# EAGLE board Control Acceso Doble Faz (EAGLE 9.6.2)
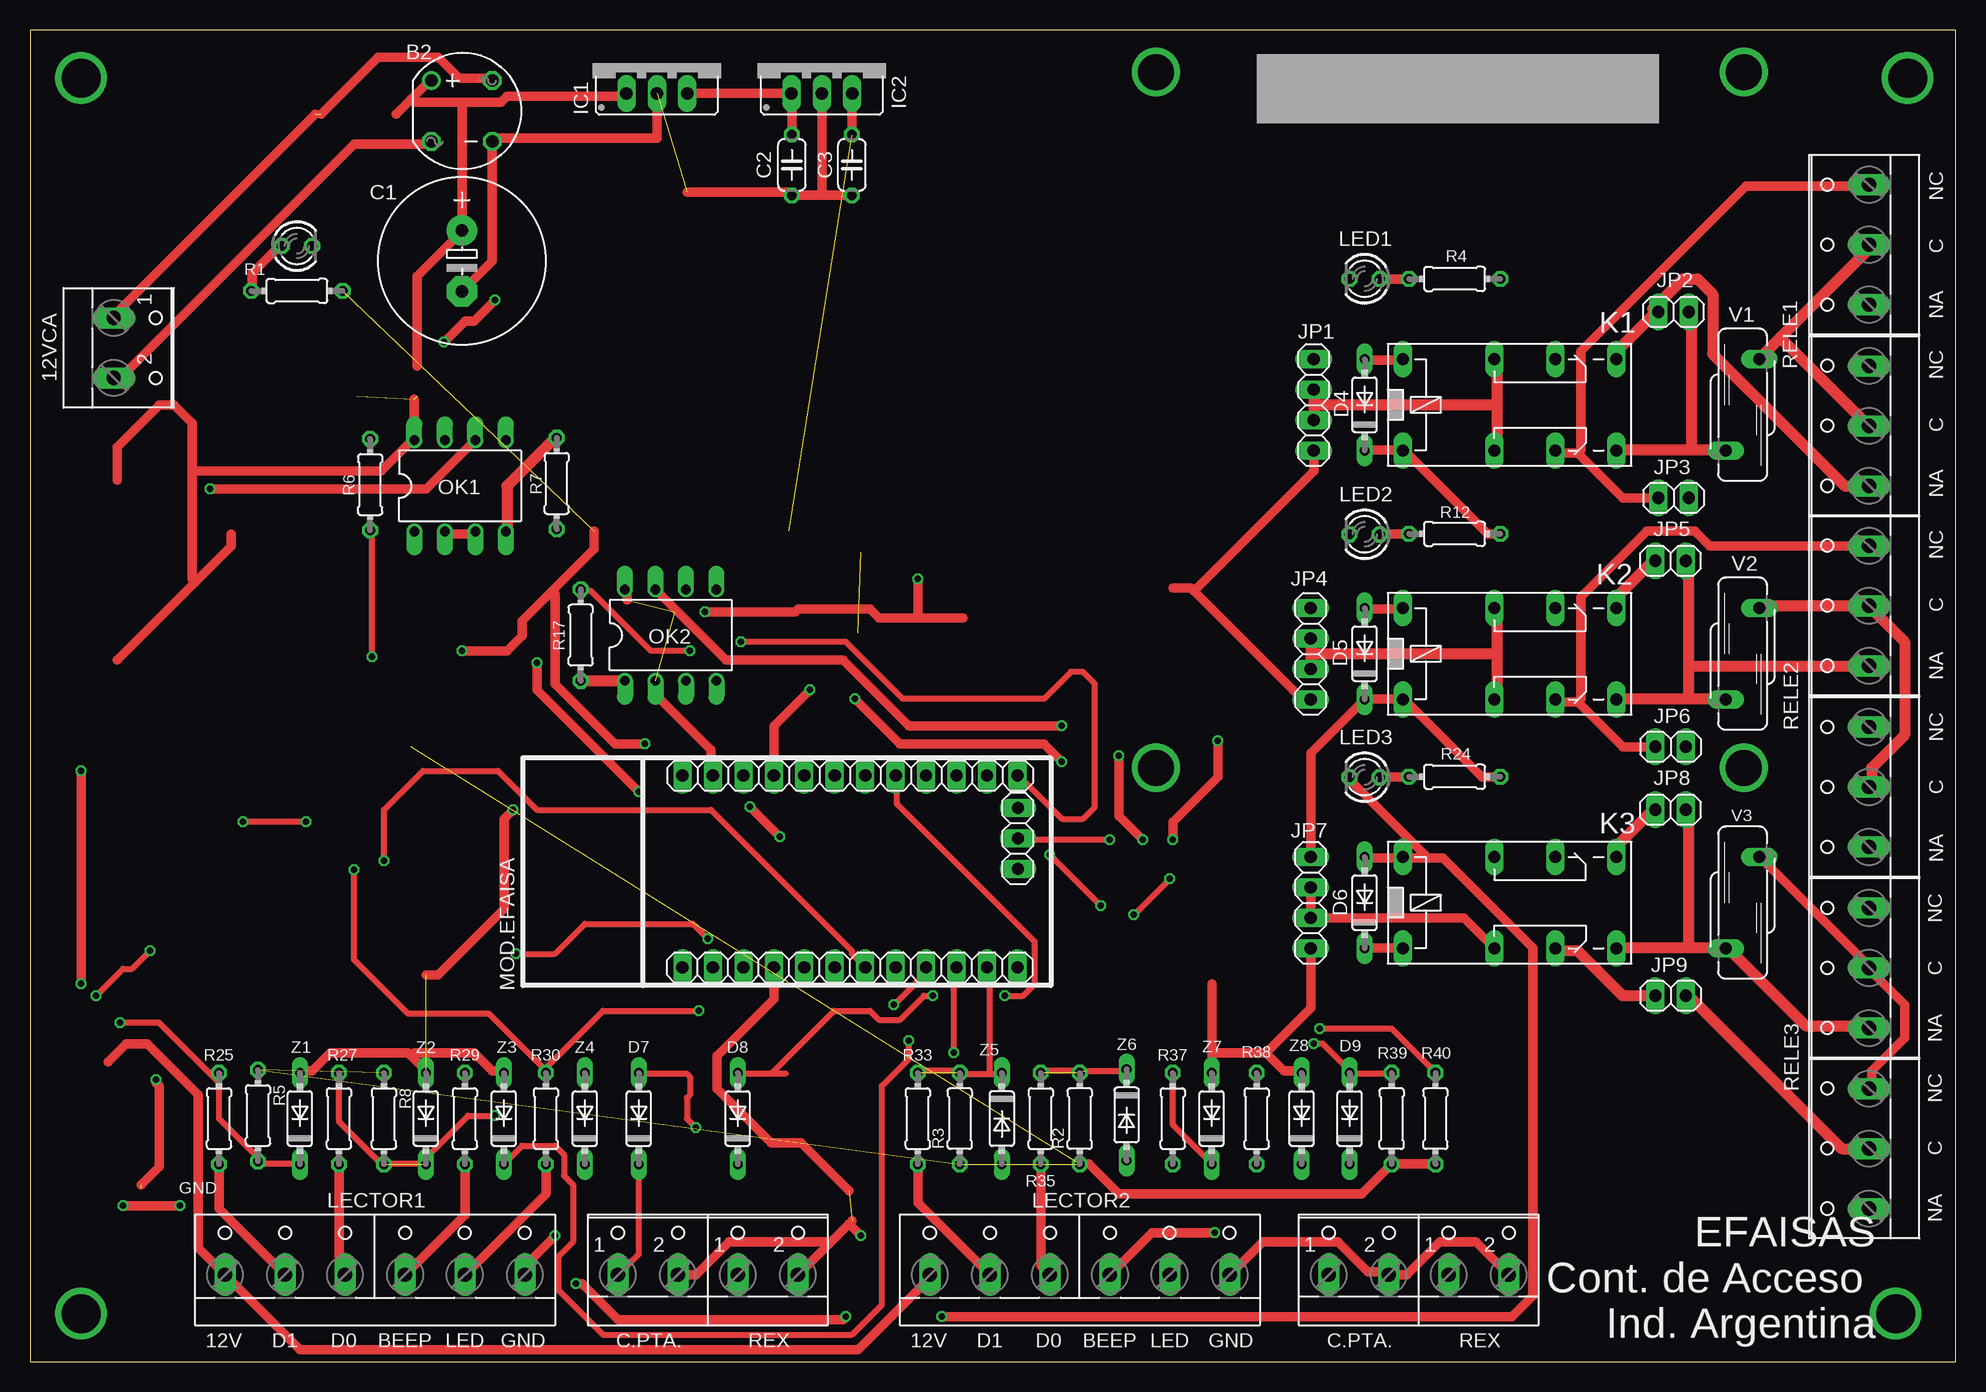
[diagram p0: board, top side]
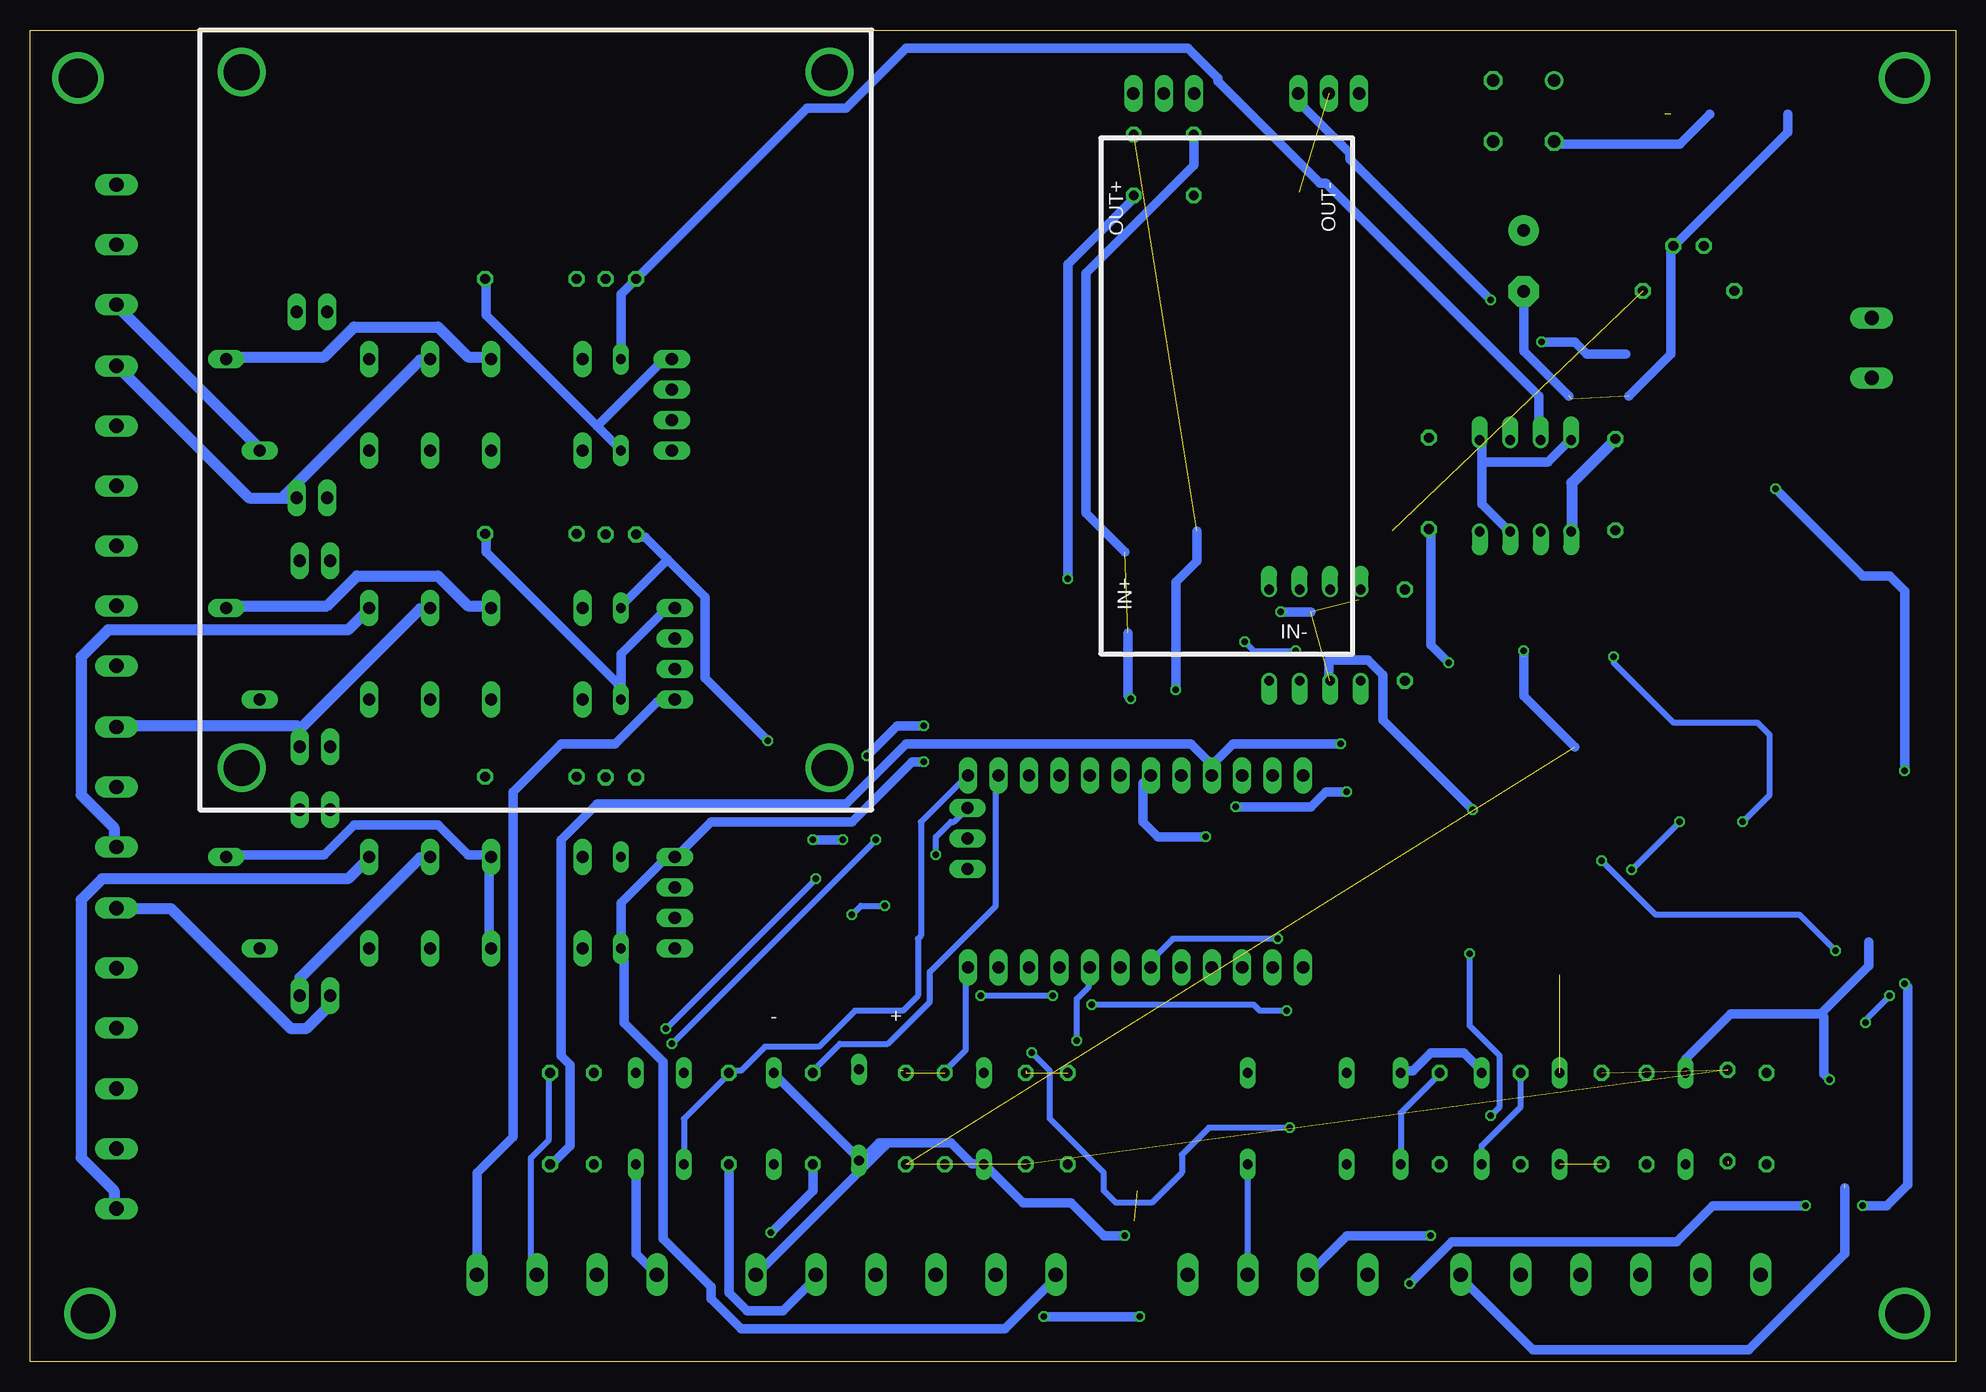
[diagram p1: board, bottom side, seen from below]

Size 160.5 x 111 mm. Coordinates in mm from the lower left corner, seen from the top.
Outline: 0,0 160.5,0 160.5,111 0,111 0,0
Copper layers (1*16): Top 0.035mm / dielectric 1.5mm / Bottom 0.035mm
Design rules "default *": minimum track width 0.3mm, minimum drill 20mil, track to track 0.4mm, track to pad 0.25mm, pad to pad 0.25mm, via to via 0.25mm, smd to smd 8mil, copper to edge 0.4mm, drill to drill 8mil, minimum pad ring 10mil, minimum via ring 8mil, stop-mask expansion 4mil, vias tented up to drill 0mil, thermal gap 10mil
Net classes: 0 gruesa: width 0.9 mm, drill 0.508 mm, clearance 0.559 mm; 1 normal: width 0.8 mm, drill 0.508 mm, clearance 0.559 mm; 2 fina: width 0.5 mm, drill 0.508 mm, clearance 0.381 mm; 3 Ultra Fina: width 0.4 mm, drill 0.508 mm, clearance 0.254 mm

## Footprints (pad centres in the part's own frame; a part is rotated, then mirrored left to right if it is on the bottom)
W237-102 = drill 1.194 long: 1 -2.5,-1.27; 2 2.5,-1.27
RB1A = drill 1.016: + -2.54,2.54 | drill 1.016 octagon: - 2.54,-2.54; AC1 2.54,2.54; AC2 -2.54,-2.54
E5-13 = drill 1.016 pad 2.54: + -2.54,0 | drill 1.016 pad 2.54 octagon: - 2.54,0
C050-024X044 = drill 0.813 octagon: 1 -2.54,0; 2 2.54,0
DO35-7 = drill 0.813 long: A 3.81,0; C -3.81,0
78XXS = drill 1.016 long: GND 0,-2.54; IN -2.54,-2.54; OUT 2.54,-2.54
1X12 = drill 1.016 long: 1 -13.97,0; 2 -11.43,0; 3 -8.89,0; 4 -6.35,0; 5 -3.81,0; 6 -1.27,0; 7 1.27,0; 8 3.81,0; 9 6.35,0; 10 8.89,0; 11 11.43,0; 12 13.97,0
1X03 = drill 1.016 long: 1 -2.54,0; 2 0,0; 3 2.54,0
1X04 = drill 1.016 long: 1 -3.81,0; 2 -1.27,0; 3 1.27,0; 4 3.81,0
1X02 = drill 1.016 long: 1 -1.27,0; 2 1.27,0
351 = drill 1.016 long: 1 -3.81,-3.81; 16 -3.81,3.81; O1 8.89,-3.81; O2 8.89,3.81; P1 3.81,-3.81; P2 3.81,3.81; S1 13.97,-3.81; S2 13.97,3.81
W237-6 = drill 1.194 long: 1 -12.5,-1.27; 2 -7.5,-1.27; 3 -2.5,-1.27; 4 2.5,-1.27; 5 7.5,-1.27; 6 12.5,-1.27
LED3MM = drill 0.813 octagon: A -1.27,0; K 1.27,0
DIL08 = drill 0.813 offset: 1 -3.81,-3.81; 2 -1.27,-3.81; 3 1.27,-3.81; 4 3.81,-3.81; 5 3.81,3.81; 6 1.27,3.81; 7 -1.27,3.81; 8 -3.81,3.81
0204/7 = drill 0.813 octagon: 1 -3.81,0; 2 3.81,0
W237-103 = drill 1.194 long: 1 -5,-1.29; 2 0,-1.29; 3 5,-1.29
S10K230 = drill 1.016 long: 1 -1.397,-3.81; 2 1.397,3.81

## Placement (x,y rotation side)
12VCA  [W237-102]  8.25,84.5 270 top
B2  [RB1A]  36,104.25 0 top
C1  [E5-13]  36,91.75 270 top
C2  [C050-024X044]  63.5,99.75 270 top
C3  [C050-024X044]  68.5,99.75 270 top
D4  1N4148DO35-7  [DO35-7]  111.25,79.75 90 top
D5  1N4148DO35-7  [DO35-7]  111.25,59 90 top
D6  1N4148DO35-7  [DO35-7]  111.25,38.25 90 top
D7  1N4148DO35-7  [DO35-7]  50.75,20.25 90 top
D8  1N4148DO35-7  [DO35-7]  59,20.25 90 top
D9  1N4148DO35-7  [DO35-7]  110,20.25 90 top
IC1  LM7812  [78XXS]  52.25,108.25 0 top
IC2  LM7807  [78XXS]  66,108.25 0 top
J1  [1X12]  68.35,48.85 0 top
J4  [1X03]  82.35,43.6 270 top
JP1  [1X04]  107,79.75 90 top
JP2  [1X02]  137,87.5 180 top
JP3  [1X02]  137,72 0 top
JP4  [1X04]  106.75,59 90 top
JP5  [1X02]  136.75,66.75 180 top
JP6  [1X02]  136.75,51.25 0 top
JP7  [1X04]  106.75,38.25 90 top
JP8  [1X02]  136.75,46 180 top
JP9  [1X02]  136.75,30.5 0 top
K1  351  [351]  118.25,79.75 0 top
K2  351  [351]  118.25,59 0 top
K3  351  [351]  118.25,38.25 0 top
LECTOR1  [W237-6]  28.75,8.5 0 top
LECTOR2  [W237-6]  87.5,8.5 0 top
LED1  ON  [LED3MM]  111.25,90.25 180 top
LED2  ON  [LED3MM]  111.25,68.95 180 top
LED3  ON  [LED3MM]  111.25,48.7 180 top
LED4  ON  [LED3MM]  22.25,93 0 top
MOD.EFAISA  [1X12]  68.35,32.85 180 top
OK1  ILD30  [DIL08]  35.85,73 0 top
OK2  ILD30  [DIL08]  53.4,60.55 0 top
R1  390Ω  [0204/7]  22.25,89.25 0 top
R2  3K3  [0204/7]  87.5,20.25 90 top
R3  3K3  [0204/7]  77.5,20.25 90 top
R4  1k  [0204/7]  118.75,90.25 0 top
R5  3K3  [0204/7]  19,20.5 270 top
R6  120Ω  [0204/7]  28.35,73.1 270 top
R7  120Ω  [0204/7]  43.9,73.2 270 top
R8  3K3  [0204/7]  29.5,20.25 270 top
R12  1k  [0204/7]  118.75,69 0 top
R17  120Ω  [0204/7]  45.9,60.55 90 top
R24  1k  [0204/7]  118.75,48.75 0 top
R25  100Ω  [0204/7]  15.75,20.25 270 top
R27  100Ω  [0204/7]  25.75,20.25 270 top
R29  100Ω  [0204/7]  36.25,20.25 270 top
R30  100Ω  [0204/7]  43,20.25 270 top
R33  100Ω  [0204/7]  74,20.25 270 top
R35  100Ω  [0204/7]  84.25,20.25 270 top
R37  100Ω  [0204/7]  95.25,20.25 270 top
R38  100Ω  [0204/7]  102.25,20.25 270 top
R39  4K7  [0204/7]  113.5,20.25 90 top
R40  4K7  [0204/7]  117.15,20.25 90 top
RELE1  [W237-103]  152,93.1 90 top
RELE2  [W237-103]  152,63 90 top
RELE3  [W237-103]  152,32.8 90 top
RELE4  [W237-103]  152,78 90 top
RELE5  [W237-103]  152,47.9 90 top
RELE6  [W237-103]  152,17.75 90 top
V1  S10K230  [S10K230]  142.75,79.75 180 top
V2  S10K230  [S10K230]  142.75,59 180 top
V3  S10K230  [S10K230]  142.75,38.25 180 top
X1  [W237-102]  51.5,8.5 0 top
X2  [W237-102]  110.75,8.5 0 top
X3  [W237-102]  120.75,8.5 0 top
X4  [W237-102]  61.5,8.5 0 top
Z1  ZENNER 4V7  [DO35-7]  22.5,20.25 90 top
Z2  ZENNER 4V7  [DO35-7]  33,20.25 90 top
Z3  ZENNER 4V7  [DO35-7]  39.5,20.25 90 top
Z4  ZENNER 4V7  [DO35-7]  46.25,20.25 90 top
Z5  ZENNER 4V7  [DO35-7]  81,20.25 270 top
Z6  ZENNER 4V7  [DO35-7]  91.4,20.55 270 top
Z7  ZENNER 4V7  [DO35-7]  98.5,20.25 90 top
Z8  ZENNER 4V7  [DO35-7]  106,20.25 90 top

## Library data of the parts
12VCA X1-X4 = con-wago-500; MPN: 237-102; OC_FARNELL: unknown; OC_NEWARK: 70K9898
B2 = rectifier
C1-C3 R1-R8 R12 R17 R24 R25 R27 R29 R30 R33 R35 R37-R40 = rcl
D4-D9 Z1-Z8 = diode
IC1 IC2 = v-reg
J1 J4 JP1-JP9 MOD.EFAISA = pinhead
K1-K3 = relay; OC_FARNELL: unknown; OC_NEWARK: unknown
LECTOR1 LECTOR2 = con-wago-500; OC_FARNELL: unknown; OC_NEWARK: unknown
LED1-LED4 = led
OK1 OK2 = optocoupler; MF: VISHAY/TELEFUNKEN; MPN: ILD30; OC_FARNELL: 1612448; OC_NEWARK: 58K1668
RELE1-RELE6 = con-wago-500; MPN: 237-103; OC_FARNELL: unknown; OC_NEWARK: 18M7116
V1-V3 = varistor

## Nets
+3V3 [normal]: C3.1 IC2.OUT J1.4 R1.2 R2.1 R3.1 R5.1 R8.1 R39.1 R40.1
+12V [normal]: C2.1 D4.C D5.C D6.C IC1.OUT IC2.IN JP1.4 JP4.4 JP7.4 K1.1 K2.1 K3.1 LECTOR1.1 LECTOR2.1 R4.2 R12.2 R24.2
+24V [normal]: B2.+ C1.+ IC1.IN
A6 [fina]: D9.A J4.2 R39.2
A7 [fina]: J4.1 R40.2 X3.1
GNDA [normal]: B2.- C1.- C2.2 C3.2 IC1.GND IC2.GND J1.2 JP1.1 JP4.1 JP7.1 LECTOR1.6 LECTOR2.6 LED4.K MOD.EFAISA.9 OK1.2 OK1.3 OK1.5 OK1.8 OK2.2 OK2.8 X1.2 X2.2 X3.2 X4.2 Z1.A Z2.A Z3.A Z4.A Z5.A Z6.A Z7.A Z8.A
N$1 [normal]: 12VCA.1 B2.AC1
N$2 [normal]: 12VCA.2 B2.AC2
N$3 [fina]: MOD.EFAISA.4 R6.2 R30.1 Z4.C
N$9 [fina]: MOD.EFAISA.6 R5.2 R25.1 Z1.C
N$10 [fina]: D7.A MOD.EFAISA.3
N$12 [normal]: J1.6 R7.2
N$13: OK1.1 R6.1
N$14: OK2.1 R17.1
N$15 [fina]: MOD.EFAISA.7 R8.2 R27.1 Z2.C
N$16: OK1.4 R7.1
N$17 [normal]: D4.A K1.16 LED1.K OK1.7
N$18 [normal]: D5.A K2.16 LED2.K OK2.7
N$19 [normal]: D6.A K3.16 LED3.K OK1.6
N$20: JP9.1 K3.O1 RELE3.3
N$21 [normal]: LECTOR1.2 R25.2
N$22 [normal]: LECTOR1.3 R27.2
N$23 [fina]: MOD.EFAISA.5 R29.1 Z3.C
N$24 [fina]: MOD.EFAISA.2 R3.2 R33.1 Z5.C
N$25 [normal]: LECTOR1.4 R29.2
N$26 [normal]: LECTOR2.2 R33.2
N$27 [fina]: MOD.EFAISA.1 R2.2 R35.1 Z6.C
N$30 [normal]: LECTOR1.5 R30.2
N$31 [fina]: D7.C X1.1
N$33 [normal]: LECTOR2.3 R35.2
N$34 [normal]: LECTOR2.4 R37.2
N$36 [normal]: LED4.A R1.1
N$37 [normal]: JP6.1 K2.O1 RELE2.3
N$38: JP2.2 K1.S2 RELE4.1
N$40: JP3.2 K1.O2 RELE4.3
N$41 [normal]: JP3.1 K1.O1 RELE1.3
N$42 [normal]: LED3.A R24.1
N$44: JP6.2 K2.O2 RELE5.3
N$45 [normal]: JP7.2 JP7.3 K3.P1 K3.P2 RELE3.2 RELE6.3 V3.1
N$46 [normal]: LECTOR2.5 R38.2
N$47 [normal]: D9.C X2.1
N$50: JP5.2 K2.S2 RELE5.1
N$52: JP8.2 K3.S2 RELE6.1
N$53 [normal]: LED2.A R12.1
N$54 [normal]: LED1.A R4.1
N$55: JP1.2 JP1.3 K1.P1 K1.P2 RELE1.2 RELE4.2 V1.1
N$56: JP2.1 K1.S1 RELE1.1 V1.2
N$57: JP9.2 K3.O2 RELE6.2
N$58: JP5.1 K2.S1 RELE2.1 V2.2
N$59: JP4.2 JP4.3 K2.P1 K2.P2 RELE2.2 RELE5.2 V2.1
N$60: JP8.1 K3.S1 RELE3.1 V3.2
N$61 [fina]: D8.A J1.8
N$62 [fina]: D8.C X4.1
OUT1 [fina]: J1.11 R37.1 Z7.C
OUT2 [fina]: J1.12 R17.2 R38.1 Z8.C

## Tracks (layer width: path | path; a pad name or v marks a point on that pad's centre or on a via)
+3V3  (via drill 0.51)  (6 unrouted)
  Top 0.8: v65,56 62,53 J1.4 | 47,69.25 47,67.75 43.5,64.25 | 43.5,64.25 41,61.75 41,60.5 39.75,59.25 v36,59.25 | v51.25,51.5 48.75,51.5 43.75,56.5 43.75,64 43.5,64.25 | R40.1 117,16.5 113.5,16.5 R39.1 113.25,16.25 111,14 90.75,14 88.25,16.5 | 68.5,102.25 C3.1 68.5,105.5 IC2.OUT
  Bottom 0.8: 63.25,69.25 63.25,66.75 65,65 v65,56 | v36,59.25 36,55.5 31.75,51.25 | v51.25,51.5 60.25,51.5 62,49.75 J1.4 62.25,50 63.75,51.5 87.5,51.5 92.5,46.5 113.25,46.5 116.25,43.5 116.25,25.5 115.5,24.75 115.5,18 117,16.5 R40.1
+12V  (via drill 0.51)  (1 unrouted)
  Top 0.8: C2.1 63.5,105.5 IC2.IN 63.25,105.75 55,105.75 IC1.OUT | v34.5,85 36.25,86.75 37,86.75 v38.75,88.5 | D4.C 111.25,76 114.25,76 K1.1 114.75,75.75 121.5,69 R12.2 | D6.C 111.25,34.5 114.25,34.5 K3.1 | R24.2 121,48.75 114.75,55 K2.1 114.25,55.25 111.25,55.25 D5.C 111,55 106.75,50.75 JP7.4 | 6.5,25 8,26.5 9.75,26.5 14,22.25 14,9.5 16.25,7.25 LECTOR1.1 16.5,7 22.5,1 69,1 75,7 LECTOR2.1 | v68.75,55.25 72.5,51.5 84.5,51.5 v86,50
  Bottom 0.8: 69.25,67.5 72.5,70.75 72.5,90.75 63.5,99.75 C2.1 | 27.5,84 30.75,84 31.75,85 v34.5,85 | v38.75,88.5 50.5,100.25 50.5,100.75 54.75,105 54.75,105.5 IC1.OUT | 113.25,78 111.25,76 D4.C | 113.25,78 122.5,87.25 122.5,90.25 R4.2 | 113.25,78 107.75,83.5 107,83.5 JP1.4 | JP4.4 106.75,62.75 107.5,62.75 111.25,59 D5.C 111.5,56.5 122.5,67.5 122.5,69 R12.2 | LECTOR2.1 75,7 79.25,2.75 101.25,2.75 103.75,5.25 103.75,6.25 107.75,10.25 107.75,25 111,28.25 111,34.25 D6.C 111.25,38.25 107.5,42 106.75,42 JP7.4 106.5,42.25 103.75,45 92,45 87,50 v86,50 | 69,60.75 69,55.5 v68.75,55.25
+24V
  Top 0.8: 32.25,83 32.25,90.5 36,94.25 C1.+ 36,105 | 31.75,105.25 33.25,106.75 B2.+ | 31.75,105.25 30.5,104 | 36,105 32,105 31.75,105.25 | 36,105 39.25,105 39.75,105.5 49.5,105.5 IC1.IN
A6  (via drill 0.51)
  Top 0.5: R39.2 113.5,24 110,24 D9.A 110,24.25 107.75,26.5 v107,26.5 | v90,43.5 82.5,43.5 J4.2
  Bottom 0.5: v107,26.5 v90,43.5
A7  (via drill 0.51)
  Top 0.5: v89.25,38 v85,42.25 | v95,40.25 v92,37.25 | v107.5,27.75 113.5,27.75 117,24.25 R40.2
  Bottom 0.5: R40.2 117.25,24 117.25,18.5 118.75,17 118.75,7.75 118.25,7.25 X3.1 | v85,42.25 85,43.75 83.75,45 83.5,45 82.5,46 J4.1 | v89.25,38 91.25,38 v92,37.25 | v107.5,27.75 v95,40.25
GNDA  (via drill 0.51)  (8 unrouted)
  Top 0.8: 16.75,69 16.75,68 13.75,65 | 7.25,58.5 13.75,65 | 7.25,73.5 7.25,76.25 10.75,79.75 12,79.75 13.5,78.25 13.5,74.25 | 13.5,74.25 13.5,65.25 13.75,65 | OK1.2 34.75,69 37,69 OK1.3 | 32,80.25 32,77 OK1.8 31.75,76.75 29.25,74.25 13.5,74.25 | 49.75,63.5 49.75,64.25 OK2.8 | 74,62 70.75,62 70,62.75 64,62.75 63.75,62.5 v56.25,62.5 | 74,62 77.75,62 | J1.2 56.75,49 56.75,51 52.25,55.5 52.25,56.5 OK2.2 | 66,97.25 68.5,97.25 C3.2 | 66,97.25 63.5,97.25 C2.2 63.25,97.5 54.75,97.5 | 66,97.25 IC2.GND | IC1.GND 52.25,102 38.75,102 B2.- 38.5,101.5 38.5,91.75 36,89.25 C1.- | v74,65.25 74,62 | 31.75,25.5 33,24.25 Z2.A | 31.75,25.5 31.5,25.75 25,25.75 23.5,24.25 22.5,24.25 Z1.A | Z3.A 39.5,24.25 38.5,24.25 37,25.75 32,25.75 31.75,25.5 | 66.5,9.75 64,7.25 X4.2 | 66.5,9.75 68.25,11.5 | 68.25,11.5 68.5,11.75 | MOD.EFAISA.9 62,30.25 57.25,25.5 57.25,22.75 61.75,18.25 64.25,18.25 68.25,14.25 | X1.2 54,7.25 55.5,7.25 58.25,10 66.25,10 66.5,9.75 | 95.25,64.5 96.75,64.5 97,64.25 | 97,64.25 106,55.25 106.75,55.25 JP4.1 | JP1.1 107,74.25 97,64.25 | 98.5,31.5 98.5,25.75 | 98.5,25.75 Z7.A | 103,25.75 104.5,24.25 106,24.25 Z8.A | 98.5,25.75 103,25.75 | JP7.1 106.75,29.5 103,25.75 | X3.2 123.25,7.25 120.5,10 117.5,10 114.75,7.25 113.25,7.25 X2.2 113,7.5 111.5,7.5 109,10 102.75,10 100,7.25 LECTOR2.6 | v69.25,10.5 68.25,11.5 | LECTOR1.6 41.25,8 v43.75,10.5 | v10.5,23.5 10.5,23.25 10.75,23 10.75,16.25 9.25,14.75 | v40.25,46 39.5,45.25 39.5,37.75 34,32.25 33,32.25
  Bottom 0.8: 39.5,75 39.5,71.5 37.25,69.25 OK1.3 | 39.5,75 39.5,76.75 OK1.5 | 27.25,80.5 23.75,84 23.75,93 LED4.K 23.25,93.25 14,102.5 14,104 | 39.5,75 34,75 32.25,76.75 OK1.8 | OK2.2 52.25,56.75 52.25,58.5 49,58.5 47.75,57.25 47.75,53.5 v40.25,46 | 53.75,62.5 v56.25,62.5 | v74,65.25 74,91.5 68.5,97 C3.2 | 32.25,80.5 36,84.25 C1.- | Z4.A 46.25,24.25 45.25,24.25 43.75,25.75 41,25.75 39.5,24.25 Z3.A | 7.25,35 7.25,33 11.25,29 | 11.25,29 18.75,29 22.5,25.25 Z1.A | 9.25,14.5 9.25,9 17.25,1 35.25,1 41.25,7 LECTOR1.6 | 89.25,18.25 89.75,18.25 91.25,16.75 Z6.A 91.5,17 98.5,24 Z7.A | 89.25,18.25 83.75,18.25 82,16.5 81,16.5 Z5.A 80.75,16.25 77.75,13.25 73.75,13.25 71,10.5 v69.25,10.5 | LECTOR2.6 100,7.25 89.25,18 89.25,18.25 | X3.2 123.25,15.75 120.25,18.75 120.25,47.5 116.25,51.5 111.75,51.5 108.25,55 106.75,55 JP4.1 | v43.75,10.5 50.75,10.5 54,7.25 X1.2 | v10.5,23.5 11,24 11,28.75 11.25,29
N$1  (1 unrouted)
  Top 0.8: 23.75,104 6.75,87 12VCA.1 | 24.25,104 29,108.75 34,108.75 35.75,107 38.5,107 B2.AC1
N$2
  Top 0.8: 12VCA.2 7.5,82 27,101.5 33.25,101.5 B2.AC2
  Bottom 0.8: 20.5,104 23,101.5 33.25,101.5 B2.AC2
N$3  (via drill 0.51)
  Top 0.5: v28.5,58.75 28.5,69.25 R6.2 | v23,45 v17.75,45 | v27,41 27,33.5 31.5,29 38.25,29 43,24.25 R30.1 43,24.5 47.75,29.25 v55.75,29.25 | v72,29.75 74.5,32.25 74.5,32.75 MOD.EFAISA.4
  Bottom 0.5: Z4.C 46.25,20.75 43,24 R30.1 | v28.5,58.75 28.5,58.25 23.5,53.25 16.5,53.25 15.5,52.25 15.5,47.25 v17.75,45 | v27,41 v23,45 | v72,29.75 58.5,29.75 58,29.25 v55.75,29.25
N$5  (via drill 3.25)
  other vias: 4.25,107
N$9  (via drill 0.51)  (1 unrouted)
  Top 0.5: 19.5,16.5 22.5,16.5 Z1.C | 19.5,16.5 19,16.5 | 15.75,23.25 15.75,20.25 19.5,16.5 | 15.75,23.25 R25.1 | v29.5,41.75 29.5,46 32.75,49.25 39,49.25 42.25,46 56.75,46 68.5,34.25 68.5,34 69.5,33 MOD.EFAISA.6 | v10,34.25 8.5,32.75 7.75,32.75 v5.5,30.5 | v7.5,28.25 10.75,28.25 15.75,23.25
  Bottom 0.5: v29.5,41.75 25,37.25 13,37.25 v10,34.25 | v5.5,30.5 7.5,28.5 v7.5,28.25
N$10  (via drill 0.51)
  Top 0.5: D7.A 50.75,24 54.75,24 55,23.75 55,22.25 54.75,22 54.75,20.25 v55.5,19.5 | v77,25.75 77,32.75 MOD.EFAISA.3
  Bottom 0.5: v77,25.75 75.5,24.25 75.5,20.25 71,15.75 71,14.25 70,13.25 67,13.25 64.5,15.75 64.5,17.25 62.25,19.5 v55.5,19.5
N$12  (via drill 0.51)
  Top 0.8: v42.25,58.25 42.25,56 v50.75,47.5 | v62.5,43.75 v60,46.25
  Bottom 0.8: v42.25,58.25 43.75,59.75 43.75,69.25 R7.2 | v50.75,47.5 52.5,47.5 53.75,46.25 v60,46.25 | v62.5,43.75 66.5,43.75 67.75,45 67.75,48.25 67.25,48.75 J1.6
N$13
  Bottom 0.9: OK1.1 32,69.25 32,73.25 28.5,76.75 R6.1
N$14
  Top 0.9: R17.1 46,56.75 49.5,56.75 OK2.1
N$15  (via drill 0.51)  (1 unrouted)
  Top 0.5: 32.5,16.5 33,16.5 Z2.C 32.5,16.5 | 32.5,16.5 29.25,16.5 25.75,20 R27.1 | v56.5,35.25 55.25,36.5 46.25,36.5 43.75,34 v40.5,34 | v38.75,20.5 36.5,20.5 32.5,16.5
  Bottom 0.5: v56.5,35.25 65.25,35.25 67,33.5 67,33 MOD.EFAISA.7 | v40.5,34 40.5,28 38,25.5 38,21.25 v38.75,20.5
N$16
  Top 0.9: OK1.4 39.75,69.25 39.75,73 43.75,77 R7.1
N$17
  Top 0.8: D4.A 111.25,83.5 114.25,83.5 K1.16
  Bottom 0.8: OK1.7 34.75,77 34.75,80.5 52.5,98.25 53,98.25 61.5,106.75 61.5,107 64,109.5 87.5,109.5 92.5,104.5 95.75,104.5 110,90.25 LED1.K 110.25,90 111.25,89 D4.A
N$18  (via drill 0.51)
  Top 0.8: D5.A 111.25,62.75 114.25,62.75 K2.16 | v86,53 73.25,53 67.75,58.5 58,58.5 52.25,64.25 OK2.7 | v90.75,50.5 90.75,45.5 v92.75,43.5 | v95.25,43.5 95.25,45 99,48.75 v99,51.75
  Bottom 0.8: v86,53 88.25,53 v90.75,50.5 | v95.25,43.5 v92.75,43.5 | v99,51.75 104.25,57 104.25,63.75 107.38,66.88 | 107.38,66.88 109.25,68.75 109.75,68.75 LED2.K | 107.38,66.88 111.25,63 D5.A
N$19  (via drill 0.51)
  Top 0.8: v15,72.75 33,72.75 37,76.75 OK1.6 | v4.25,31.5 v4.25,49.25 | v12.5,13 v7.75,13 | v45.5,6.5 46,6.5 49,3.5 67.75,3.5 v68,3.75 | v76,3.75 123.5,3.75 125.25,5.5 125.25,34.5 117.75,42 116.25,42 | 116.25,42 114.5,42 K3.16 114.25,42 111.25,42 D6.A | LED3.K 110,48.5 116.25,42.25 116.25,42
  Bottom 0.8: v15,72.75 7.75,65.5 5.5,65.5 4.25,64.25 v4.25,49.25 | v4.25,31.5 4,31.25 4,14.75 5.75,13 v7.75,13 | v12.5,13 20.25,13 23.25,10 42,10 v45.5,6.5 | v76,3.75 v68,3.75
N$20
  Top 0.9: JP9.1 132.75,30.5 129,34.25 127.25,34.25 K3.O1
  Bottom 0.9: RELE3.3 153.25,37.75 148.75,37.75 138.75,27.75 137.5,27.75 135.5,29.75 135.5,30.5 JP9.1
N$21
  Top 0.8: R25.2 15.75,12.75 21.25,7.25 LECTOR1.2
N$22
  Top 0.8: R27.2 25.75,7.75 26.25,7.25 LECTOR1.3
N$23  (via drill 0.51)
  Top 0.5: v73.25,26.75 73.25,25.25 71,23 71,4.75 68.5,2.25 47.75,2.25 44,6 44,8.75 45.25,10 45.25,14.75 44.5,15.5 44.5,17.25 43.75,18 41,18 39.5,16.5 Z3.C
  Bottom 0.5: R29.1 36.25,21.25 39.5,18 Z3.C | v73.25,26.75 73.25,30.25 72.25,31.25 72.25,32.75 MOD.EFAISA.5
N$24  (2 unrouted)
  Top 0.5: 77.5,24.25 74,24.25 R33.1 | 77.5,24 80,24 | 80,24 81,24 Z5.C | 80,24 80,32.75 MOD.EFAISA.2
N$25
  Top 0.8: R29.2 36.25,12.25 31.25,7.25 LECTOR1.4
N$26
  Top 0.8: R33.2 74,13.25 80,7.25 LECTOR2.2
N$27  (2 unrouted)
  Top 0.5: 87.75,24.25 84.25,24.25 R35.1 | 88,24.25 91.25,24.25 Z6.C
  Bottom 0.5: MOD.EFAISA.1 82.5,32.75 82.5,26 84.25,24.25 R35.1
N$30
  Top 0.8: R30.2 43,14 36.25,7.25 LECTOR1.5
N$31
  Top 0.5: D7.C 50.75,9 49,7.25 X1.1
N$33
  Top 0.8: R35.2 84.25,8 85,7.25 LECTOR2.3
N$34  (via drill 0.51)
  Top 0.8: v98.75,10.75 93.5,10.75 90,7.25 LECTOR2.4
  Bottom 0.8: R37.2 95.25,14.25 v98.75,10.75
N$35  (via drill 3.25)
  other vias: 155.5,4
N$36
  Top 0.8: R1.1 18.5,89.25 18.5,90.75 20.75,93 LED4.A
N$37
  Top 0.8: 129,55 127.25,55 K2.O1 | 129,55 132.75,51.25 JP6.1 | RELE2.3 140,68 138.75,69.25 134.75,69.25 129.25,63.75 129.25,55.25 129,55
N$38
  Top 0.9: K1.S2 132.25,83.75 132.25,84.25 135.5,87.5 JP2.2 135.25,87.75 137.75,90.25 139,90.25 140.25,89 140.25,84 151.25,73 RELE4.1
N$40
  Bottom 0.9: 139.25,72 142.25,72 153.25,83 RELE4.3 | 139.25,72 JP3.2 | K1.O2 127.25,83.5 128,83.5 139.25,72.25 139.25,72
N$41
  Top 0.8: 129,75.75 127.25,75.75 K1.O1 | 129,75.75 132.75,72 JP3.1 | RELE1.3 153.25,98 143,98 129.25,84.25 129.25,76 129,75.75
N$42
  Top 0.8: R24.1 112.75,48.75 LED3.A
N$44
  Bottom 0.9: 138,52.75 128,62.75 127.25,62.75 K2.O2 | 138,52.75 138,51.25 JP6.2 | RELE5.3 153.25,53 138.25,53 138,52.75
N$45
  Top 0.8: JP7.3 JP7.2 107,37 119.5,37 K3.P1 | V3.1 144.25,42 153.25,33 RELE3.2 153.5,32.5 156.25,29.75 156.25,27 153.5,24.25 153.5,22.75 RELE6.3
  Bottom 0.8: K3.P1 122.25,34.5 122.25,42 K3.P2 122.5,42.25 124,42.25 126.5,44.75 133.5,44.75 136,42.25 144,42.25 V3.1
N$46
  Bottom 0.8: R38.2 102.25,5.75 100.75,4.25 97.75,4.25 95,7 LECTOR2.5
N$47
  Bottom 0.8: D9.C 110,9 108.25,7.25 X2.1
N$48  (via drill 3.25)
  other vias: 156.5,107
N$50
  Top 0.9: K2.S2 132.25,63 132.25,63.75 135.25,66.75 JP5.2
  Bottom 0.9: RELE5.1 153.5,43 153.5,44.5 156.25,47.25 156.25,58.75 154,61 134,61 132.25,62.75 K2.S2
N$52
  Top 0.9: K3.S2 132.25,42.25 132.25,43 135.25,46 JP8.2
  Bottom 0.9: RELE6.1 153.5,12.75 153.5,14.25 156.25,17 156.25,38.5 154.5,40.25 134,40.25 132.25,42 K3.S2
N$53
  Top 0.8: R12.1 112.75,69 LED2.A
N$54
  Top 0.8: R4.1 LED1.A
N$55
  Top 0.9: JP1.3 107,79.75 | 107,79.75 JP1.2 | 122.25,79.75 122.25,83.5 K1.P2 | 122.25,79.75 122.25,76 K1.P1 | 122.25,79.75 107,79.75 | 145.88,85.38 153.5,93 RELE1.2 | 145.88,85.38 144.25,83.75 V1.1 | 145.88,85.38 153.25,78 RELE4.2
  Bottom 0.9: K1.P2 122.25,83.75 124,83.75 126.5,86.25 133.5,86.25 136,83.75 144,83.75 V1.1
N$56
  Top 0.9: 138.5,76 141.25,76 V1.2 | 138.5,76 132.25,76 K1.S1 | 138.5,76 138.5,87.5 JP2.1
  Bottom 0.9: RELE1.1 153.25,88 141.25,76 V1.2
N$57
  Top 0.9: RELE6.2 151,17.75 138.25,30.5 JP9.2
  Bottom 0.9: K3.O2 127.25,42 128,42 138,32 138,30.5 JP9.2
N$58
  Top 0.9: 138.25,55.25 141.25,55.25 V2.2 | 138.25,55.25 132.25,55.25 K2.S1 | 138.25,55.25 138.25,58 | 138.25,58 138.25,66.75 JP5.1 | 138.25,58 RELE2.1
N$59
  Top 0.9: JP4.3 106.75,59 | 106.75,59 JP4.2 | 122.25,59 122.25,62.75 K2.P2 | 122.25,59 122.25,55.25 K2.P1 | 122.25,59 106.75,59 | V2.1 144.25,63 RELE2.2 153.5,62.75 156.25,60 156.25,52.25 153.5,49.5 153.5,48 RELE5.2
  Bottom 0.9: K2.P2 122.25,63 124,63 126.5,65.5 133.25,65.5 135.75,63 144,63 V2.1
N$60
  Top 0.9: 138.25,34.5 141.25,34.5 V3.2 141.75,34.25 148,28 153.25,28 RELE3.1 | 138.25,34.5 132.25,34.5 K3.S1 | 138.25,34.5 138.25,46 JP8.1
N$61  (via drill 0.51)
  Top 0.5: 63,24 61.75,24 | 61.75,24 59,24 D8.A | v81.25,30.5 82.75,30.5 83.75,31.5 83.75,35 72.25,46.5 72.25,48.75 J1.8 | v75.25,30.5 74.5,30.5 72.5,28.5 70.75,28.5 70,29.25 67,29.25 61.75,24
  Bottom 0.5: v75.25,30.5 v81.25,30.5
N$62
  Bottom 0.5: X4.1 D8.C
N$64  (via drill 3)
  other vias: 142.85,107.5
N$65  (via drill 3)
  other vias: 142.85,49.5
N$66  (via drill 3)
  other vias: 93.85,49.5
N$67  (via drill 3)
  other vias: 93.85,107.5
N$72  (via drill 3.25)
  other vias: 4.25,4
OUT1
  Top 0.5: R37.1 95.25,19.75 98.5,16.5 Z7.C
  Bottom 0.5: J1.11 80,48.75 80,38 85.5,32.5 85.5,30 89,26.5 93,26.5 95.25,24.25 R37.1
OUT2  (via drill 0.51)
  Top 0.5: v55,59.25 51.75,59.25 46.75,64.25 46,64.25 R17.2 | v59.25,60 68,60 72.75,55.25 84.5,55.25 86.75,57.5 87.75,57.5 88.75,56.5 88.75,46.25 87.75,45.25 86,45.25 82.5,48.75 J1.12
  Bottom 0.5: Z8.C 106,20.25 102.25,24 R38.1 102.25,24.25 101.25,24.25 99.25,26.25 94.75,26.25 91.75,29.25 87.75,29.25 86.5,30.5 86.5,35.25 86.25,35.5 86.25,45 82.5,48.75 J1.12 | v55,59.25 58.5,59.25 v59.25,60

## Text on the board
tNames: NC | C | NA | NC | C | NA | NC | C | NA | NC | C | NA | NC | C | NA | NC | C | GND | NA | EFAISAS / Cont. de Acceso / Ind. Argentina | 12V | D1 | D0 | BEEP | LED | GND | C.PTA. | REX | 12V | D1 | D0 | BEEP | LED | GND | C.PTA. | REX
bNames: OUT- | OUT+ | IN+ | IN- | + | -